# Altium PCB ETH_POE_SPI_RJ45.PcbDoc
Units mm, origin at the board's own origin, x right, y up, seen from the top; angles counter-clockwise.
Board outline 24 x 24.6 mm, 2 copper layers (Top Layer, Bottom Layer), stack 1.571 mm thick; 14 components, 24 nets, 65 pads, 6 vias.
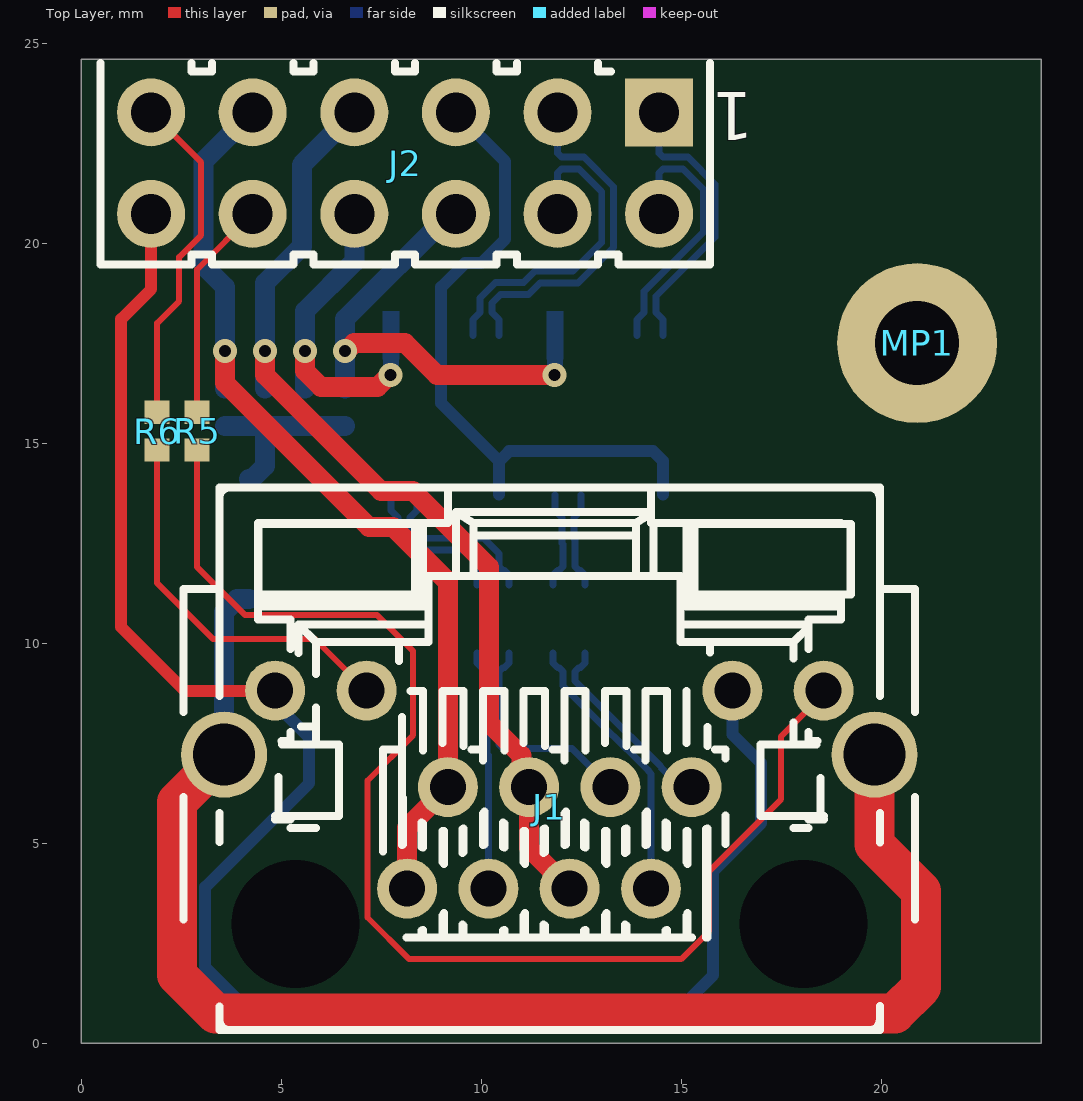
[diagram p0: Top Layer view]
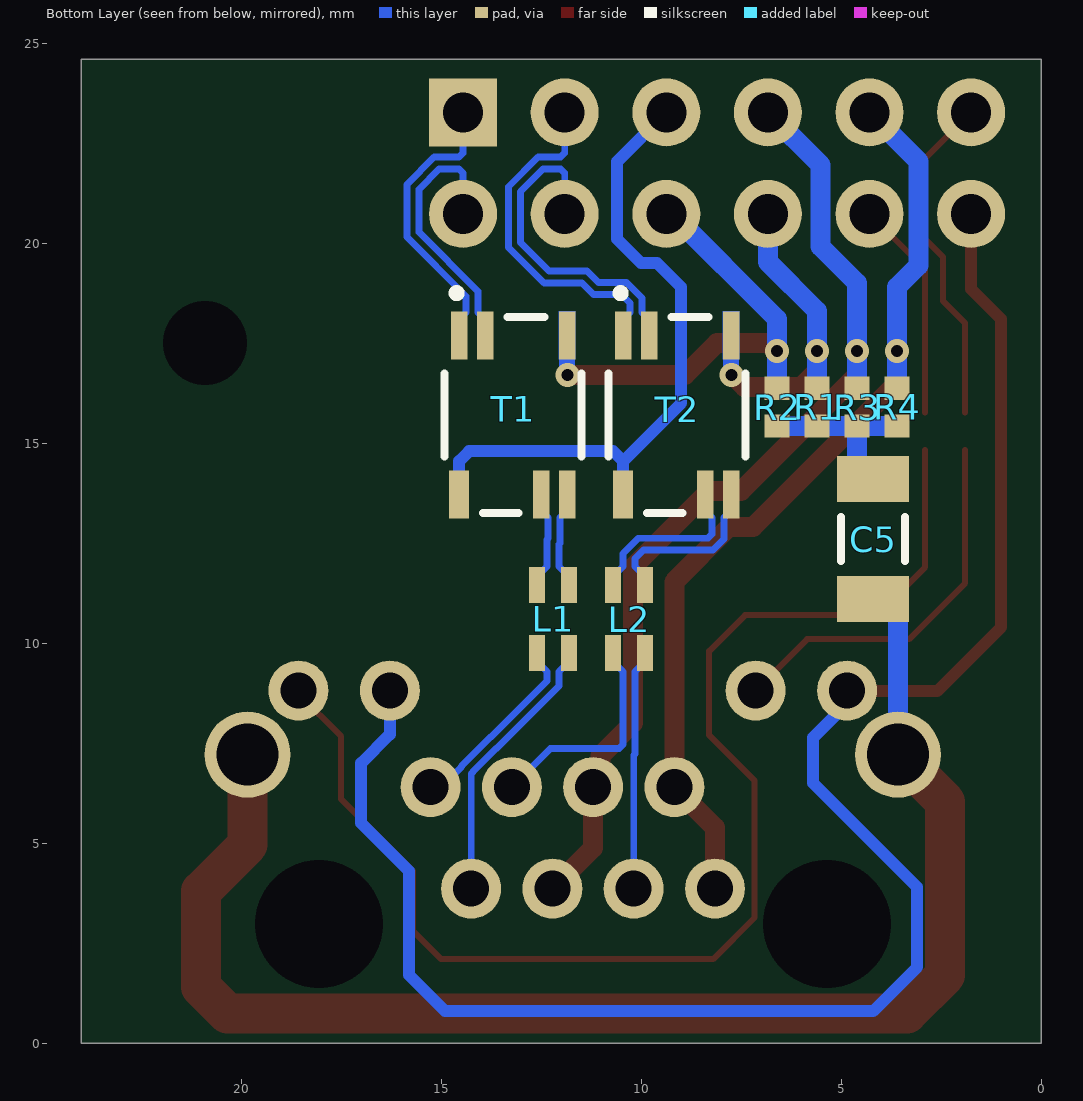
[diagram p1: Bottom Layer view, seen from below]
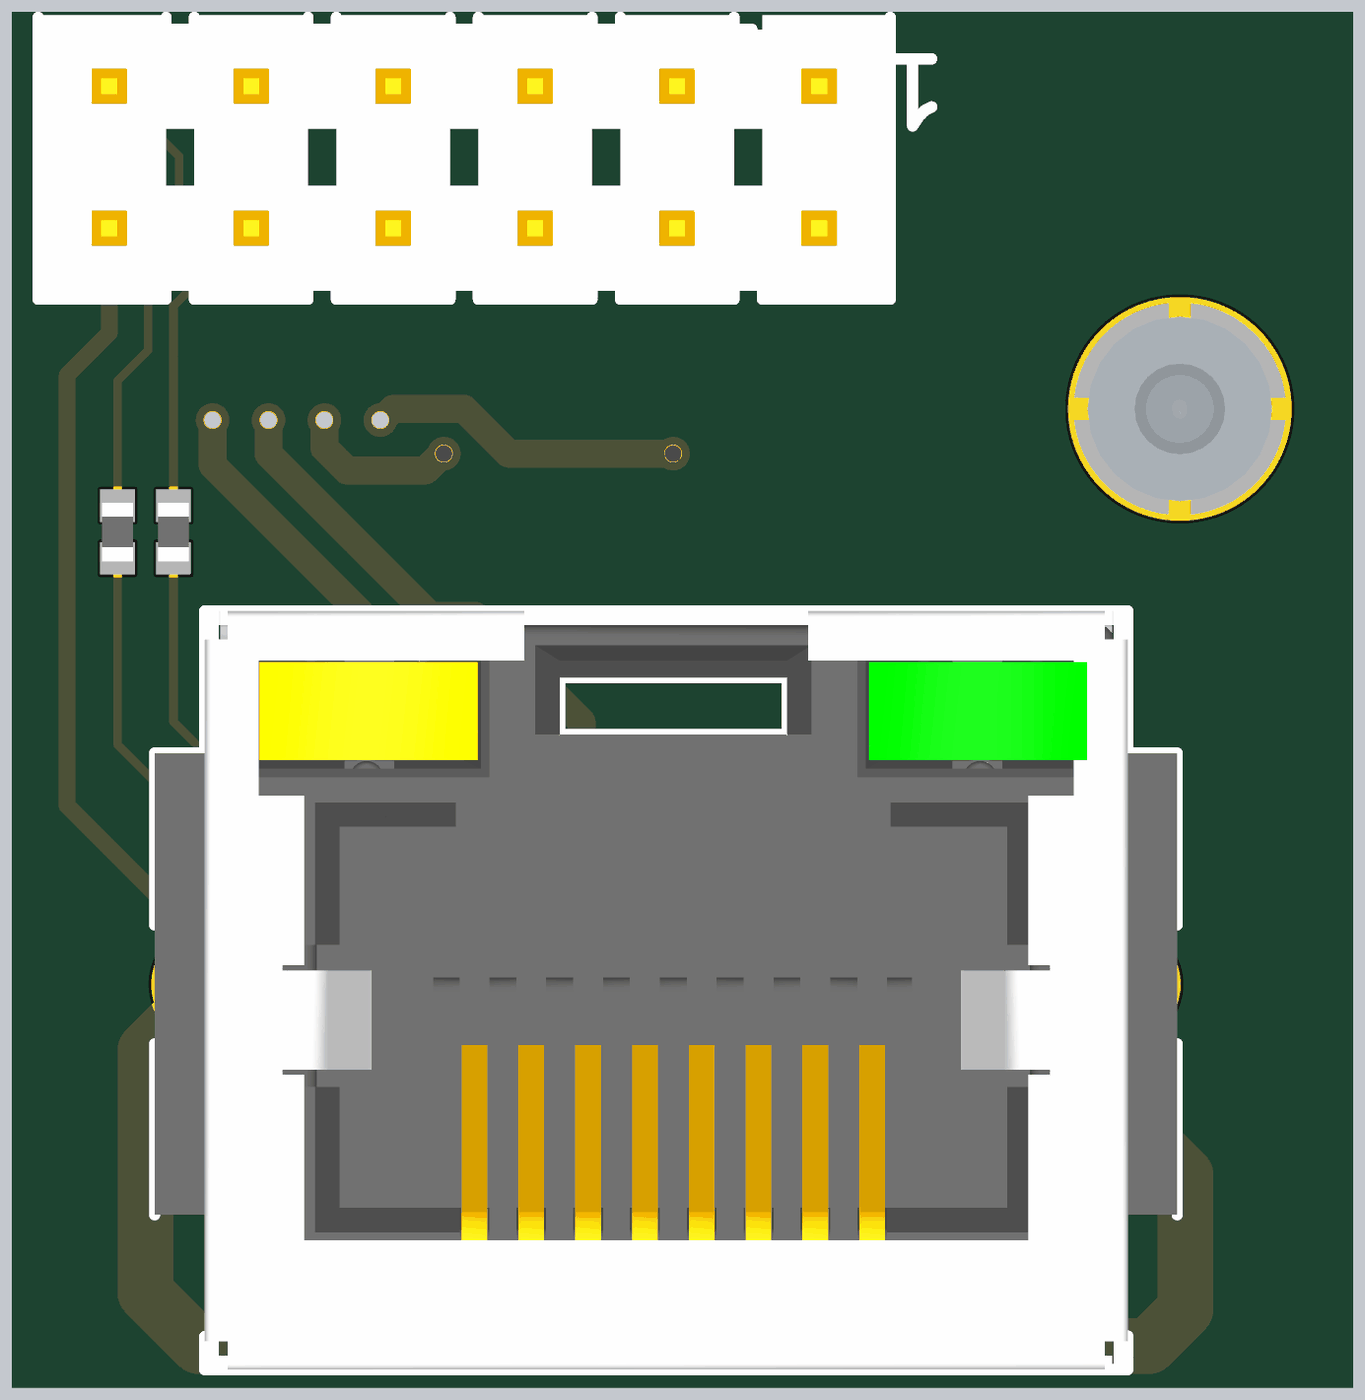
[diagram p2: 3D render of the assembled board from above, using the file's embedded part models]
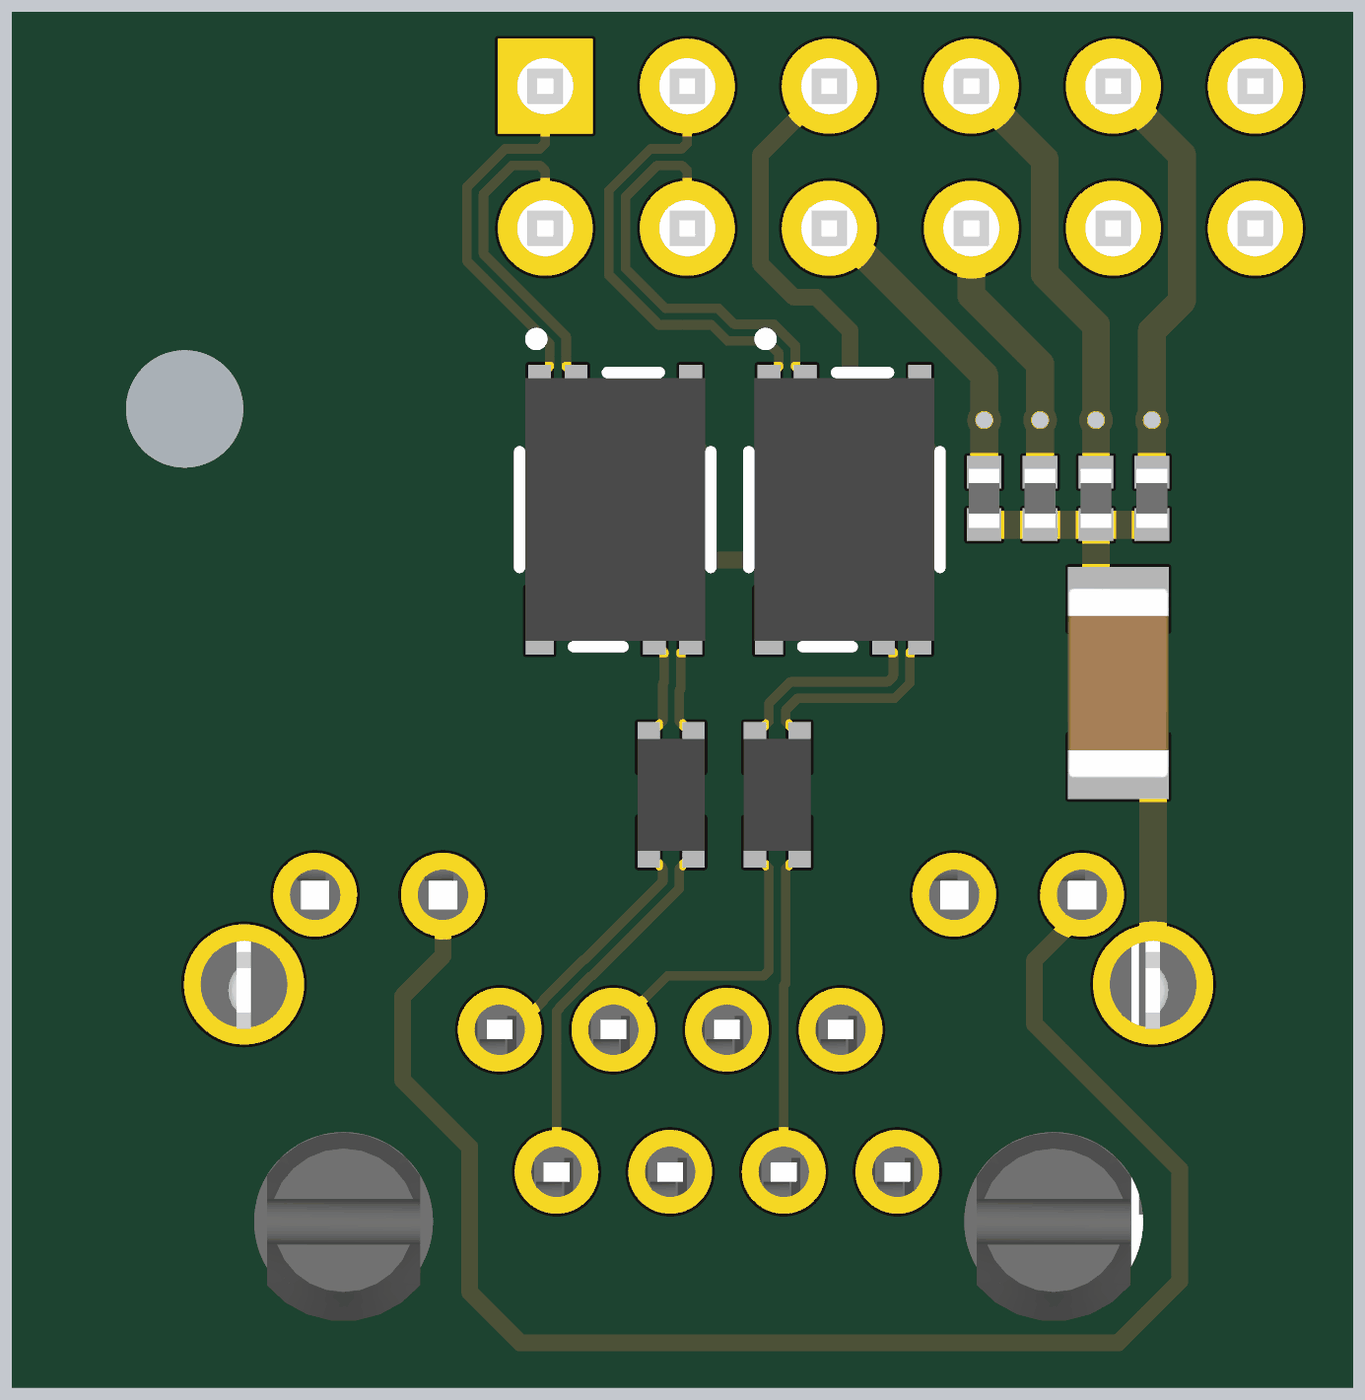
[diagram p3: 3D render of the assembled board from below, using the file's embedded part models]

## Layer stack, top to bottom
Top Solder: solder mask 0.0102, Solder Resist, Dk 3.5
Top Layer: signal copper 0.0356
Dielectric 1: dielectric 1.5, FR-4, Dk 4.8
Bottom Layer: signal copper 0.0356
Bottom Solder: solder mask 0.0102, Solder Resist, Dk 3.5

## Board outline
0,0 24,0 24,24.6 0,24.6

## Design rules (kind name [scope] priority, off if disabled: settings)
Clearance Clearance_transformer [((Net = 'PoE_POWER_3') or (Net = 'PoE_POWER_1'))] p1: gap=0 ignorepadtopadclearanceinfootprint=TRUE
Clearance [All] p2: gap=0.127 ignorepadtopadclearanceinfootprint=TRUE
DiffPairsRouting [All] p1: maxlimit=0.127 minlimit=0.127 mostfreqgap=0.127 toplayer_minwidth=0.17 toplayer_maxwidth=0.17 toplayer_prefwidth=0.17 bottomlayer_minwidth=0.17 bottomlayer_maxwidth=0.17 bottomlayer_prefwidth=0.17 impedanceprofiledriven=TRUE impedanceprofileid={63DAA46B-365F-4812-932B-840EA15B634E} impedanceprofilevalue=100.000000 maxuncoupledlength=12.7
HoleSize [All] p1: absolutevalues=TRUE maxlimit=5 minlimit=0.025 maxpercent=80.000 minpercent=20.000
MinimumSolderMaskSliver [All] p1: minsoldermaskwidth=0.1
PolygonConnect [All] p1: connectstyle=Relief reliefconductorwidth=0.254 reliefentries=4 polygonreliefangle="90 Angle" airgapwidth=0.254
RoutingVias [All] p1: holewidth=0.3 width=0.6 viastyle="Through Hole" minholewidth=0.3 minwidth=0.6 maxholewidth=0.3 maxwidth=0.6
ShortCircuit ShortCircuit_transformer [((ObjectKind = 'Pad') And (Net = 'PoE_POWER_3') And (Component = 'T2')) or ((ObjectKind = 'Pad') And (Net = 'PoE_POWER_1') And (Component = 'T1'))] p1: allowed=TRUE
ShortCircuit [(ObjectKind = 'Pad') And (Net = 'PoE_POWER_3') And (Component = 'T2') or (ObjectKind = 'Pad') And (Net = 'PoE_POWER_1') And (Component = 'T1')] p2: allowed=TRUE
SilkToSolderMaskClearance [IsPad] p1: minsilkscreentomaskgap=0.1 clearancetoexposedcopper=TRUE
SolderMaskExpansion [All] p1: expansion=0.05 istentingtop=FALSE
SupplyNets "Schematic Supply Nets_1" [InNet('P3V3')] p1: voltage=0.000
SupplyNets "Schematic Supply Nets" [InNet('SHIELD')] p2: voltage=0.000
Width [All] p1: maxlimit=3 minlimit=0.127 preferedwidth=0.2
25 further rules are at their usual default settings.

## Classes and differential pairs
net class D100: DA_CMC_N DA_CMC_P DA_N DA_P DB_CMC_N DB_CMC_P DB_N DB_P RX_N RX_P TX_N TX_P
differential pair DB_CMC: +DB_CMC_P -DB_CMC_N
differential pair DA_CMC: +DA_CMC_P -DA_CMC_N
differential pair DB: +DB_P -DB_N
differential pair DA: +DA_P -DA_N
differential pair TX: +TX_P -TX_N
differential pair RX: +RX_P -RX_N

## Components (designator, comment, footprint, x,y, rotation, side; value= is the part's Value field where it differs from the comment)
C5 "1nF" CAPC3216X180N 4.2,12.6 r90 bottom
J1 "RJ45" AMPHENOL_RJHSE-3381 11.708,5.13 r0 top
J2 "Header 12" SAMTEC_HTSW-106-23-L-D 8.1,22 r180 top
L1 "370Ohm" WE-CNSW_0805 12.2,10.6 r270 bottom
L2 "370Ohm" WE-CNSW_0805 10.3,10.6 r270 bottom
MP1 "M1.6 x 6mm" 97730606334 20.9,17.5 r0 top
R1 "75" RESC1005X40N 5.6,15.9 r90 bottom
R2 "75" RESC1005X40N 6.6,15.9 r90 bottom
R3 "75" RESC1005X40N 4.6,15.9 r90 bottom
R4 "75" RESC1005X40N 3.6,15.9 r90 bottom
R5 "510" RESC1005X40N 2.9,15.3 r270 top
R6 "510" RESC1005X40N 1.9,15.3 r270 top
T1 "74930030" 74930030 13.2,15.7 r270 bottom
T2 "74930030" 74930030 9.1,15.7 r270 bottom

## Footprints (in the part's own frame and the unit in brackets; to place one, negate y for a bottom-side part, rotate by r counter-clockwise, add the part's x,y. Pads: shape width x height; smd on the part's side, far side on the other; paste and mask are expansions set on the pad)
74930030 [mm] "Super Tiny Signal Transformer, body 4.7x3.22mm"
  rect 1.2x0.41 smd: 1(-1.99,-1.35) 2(-1.99,-0.7) 6(1.99,0.7) 7(1.99,1.35)
  rect 0.6x0.41 smd: 3(-2.29,1.35) 4(-1.69,1.35)
  rect 1.2x0.5 smd: 5(1.99,-1.35)
  Top Layer region: -1.39,1.555 -2.59,1.555 -2.59,1.145 -2.59,1.145 -1.39,1.145
  silkscreen extent -3.15,-1.71 2.45,1.71, body extent -2.35,-1.61 2.35,1.61, height 2.83
97730606334 [mm] "SMT Steel Spacer with internal Thread M1.6, height 6mm"
  round 4 / inner rect 0x0 / far side rect 0x0 hole 2.1 unplated: 1(0,0)
  body extent -1.65,-1.65 1.65,1.65, height 6
AMPHENOL_RJHSE-3381 [mm] "1 Port, 8 Positions, CAT5 RJ45 Modular Connector With Yellow and Green LEDs and Shield"
  round 1.5 hole 0.9: 1(3.556,1.27) 2(2.54,-1.27) 3(1.524,1.27) 4(0.508,-1.27) 5(-0.508,1.27) 6(-1.524,-1.27) 7(-2.54,1.27) 8(-3.556,-1.27) 9(6.858,3.683) 10(4.572,3.683) 11(-4.572,3.683) 12(-6.858,3.683)
  round 1 hole 3.2 unplated mask+1.1: M1(6.35,-2.159) M2(-6.35,-2.159)
  round 2.15 hole 1.55: SHIELD(-8.13,2.081) SHIELD(8.13,2.081)
  silkscreen extent -9.14,-4.81 9.14,8.76, body extent -9.14,-4.81 9.14,8.76, height 16.32
CAPC3216X180N [mm] "Chip Capacitor, Body 3.2x1.6mm, IPC Medium Density"
  rect 1.15x1.8 smd: 1(-1.5,0) 2(1.5,0)
  silkscreen extent -0.55,-0.8 0.55,0.8, body extent -1.7,-0.9 1.7,0.9, height 1.8
RESC1005X40N [mm] "Chip Resistor, EIA 0402, Metric 1005, Body 1.0x0.5mm, IPC Medium Density"
  rect 0.58x0.62 smd: 1(-0.47,0) 2(0.47,0)
  body extent -0.52,-0.27 0.53,0.28, height 0.4
SAMTEC_HTSW-106-23-L-D [mm] "12 Contacts - Pitch 2.54mm - Dual Row  Through Mount Straigh Header (Post Lead 5.84mm, Tail Lead 2.92mm, Insulator 2.54mm)"
  rect 1.7x1.7 hole 1: 1(-6.35,-1.27)
  round 1.7 hole 1: 2(-6.35,1.27) 3(-3.81,-1.27) 4(-3.81,1.27) 5(-1.27,-1.27) 6(-1.27,1.27) 7(1.27,-1.27) 8(1.27,1.27) 9(3.81,-1.27) 10(3.81,1.27) 11(6.35,-1.27) 12(6.35,1.27)
  silkscreen extent -7.62,-2.5 7.62,2.54, body extent -7.62,-2.54 7.62,2.54, height 8.38
WE-CNSW_0805 [mm] "SMT Common Mode Line Filter, 4-leads, body 2.00x1.20mm"
  rect 0.9x0.4 smd: 1(-0.85,0.4) 2(0.85,0.4) 3(0.85,-0.4) 4(-0.85,-0.4)
  body extent -1,-0.6 1,0.6, height 1.2

## Part data
C5: library part CC1206_1NF_2KV_10%_X7R, "Non-polarised capacitor", Case=1206, Manufacturer=GENERIC, Manufacturer1 ComponentHeight=1.8mm, Manufacturer1 Example=AVX, Manufacturer1 Part Number=1206GC102KAT2A, Tolerance=±10%, Voltage=2kV, Author="CERN DEM JLC", Component Type=Standard, CreateDate=11/19/2012, HelpURL=\\cern.ch\dfs\Applications\Altium\Datasheets\CC1206_X7R_AVX_HV-MLC.pdf, LatestRevisionDate=5/17/2017, Manufacturer Part Number=CC1206_1NF_2KV_10%_X7R, Mounted=Yes, Part Description="High Voltage MLC Chip Capacitor", Part Number=CC1206_1NF_2KV_10%_X7R, Pin Count=2, Sense=No, SMD=Yes, Socket=No, Status=None, TC=X7R
J1: library part AMPHENOL_RJHSE-3381, "1 Port, 8 Positions, CAT5 RJ45 Modular Connector With Yellow And Green LEDs", Manufacturer=AMPHENOL, Manufacturer Part Number=RJHSE-3381, Author="CERN DEM JLC", Component Type=Standard, ComponentHeight=15.88mm, ComponentLink1Description="Package Drawing", ComponentLink1URL=\\cern.ch\dfs\Applications\Altium\Datasheets\AMPHENOL_RJHSE-3381_Package.pdf, CreateDate=3/4/2019, Family=RJ45, HelpURL=\\cern.ch\dfs\Applications\Altium\Datasheets\AMPHENOL_RJHSE-3381.pdf, LatestRevisionDate=3/4/2019, Mounted=Yes, Part Description="1 Port, 8 Positions, CAT5 RJ45 Modular Jack with Yellow and Green LEDs and Shield", Part Number=AMPHENOL_RJHSE-3381, Pin Count=14, PressFit=No, Sense=No, SMD=No, Socket=No, Status=None
J2: library part SAMTEC_HTSW-106-23-L-D, "Connector 12 Male", Manufacturer=SAMTEC, Manufacturer Part Number=HTSW-106-23-L-D, Author="CERN DEM JLC", Component Type=Standard, ComponentHeight=8.38mm, CreateDate=2/22/2018, Family="Header 12", HelpURL=\\cern.ch\dfs\Applications\Altium\Datasheets\SAMTEC_HTSW-106-23-L-D.pdf, LatestRevisionDate=2/22/2018, Mounted=Yes, Part Description="12 Contacts, Pitch 2.54mm, Dual Row Through Mount Straight Header (Post Lead 5.84mm, Tail Lead 2.92mm, Insulator 2.54mm)", Part Number=SAMTEC_HTSW-106-23-L-D, Pin Count=12, PressFit=No, Sense=No, SMD=No, Socket=No, Status=Preferred, Status Comment="High Temperature"
L1 L2: library part 744231371, "WE-CNSW SMT Common Mode Line Filter, size 0805, 370Ohm, 0.478uH, 50V", Case/Size Code=0805, DC Resistance Max=0.45Ohm, Inductance=0.478uH, Insulation Test Voltage (AC)=125V, Manufacturer="Wurth Elektronik", Operating Temperature Max=125°C, Operating Temperature Min=-40°C, Rated Current=0.28A, Rated Voltage=50V, Category="Common Mode Chokes", ComponentLink1Description="Website Link", ComponentLink1URL=https://www.we-online.com/redexpert/article/744231371?ad, ComponentLink2Description="Datasheet Link", ComponentLink2URL=https://www.we-online.com/redexpert/spec/744231371?ad, Height=1.2mm, Impedance @100MHz=370Ohm, Length=2mm, Manufacturer Part Number=744231371, Match Code=WE-CNSW, Mount="Surface Mount", Packaging="Tape and Reel", Width=1.2mm, Winding Style=bifiliar
MP1: library part 97730606334R, "WA-SMSI SMT Steel Spacer with internal Thread, OD 3.3mm, M1.6 x 6mm", Manufacturer="Wurth Elektronik", Operating Temperature Max=150°C, Operating Temperature Min=-55°C, Category="SMT Spacers", ComponentLink1Description="Website Link", ComponentLink1URL=https://www.we-online.com/redexpert/article/97730606334R?ad, ComponentLink2Description="Datasheet Link", ComponentLink2URL=https://www.we-online.com/redexpert/spec/97730606334R?ad, Height=6mm, Inside Diameter=1.9mm, Inside Thread Length=2mm, Manufacturer Part Number=97730606334R, Match Code=WA-SMSI, Material=Steel, Mount="Surface Mount", Outside Diameter=3.3mm, Packaging="Tape and Reel", Surface=Tin, Thread Size=M1.6
R1 R2 R3 R4: library part R0402_75R_1%_0.0625W_100PPM, "Resistor - 1%", Case=0402, Manufacturer=GENERIC, Manufacturer1 ComponentHeight=0.4mm, Manufacturer1 Example="YAGEO PHYCOMP", Manufacturer1 Part Number=232270677509L, Power=0.0625W, Tolerance=±1%, Author="CERN DEM JLC", Component Type=Standard, CreateDate=12/3/2007, HelpURL=\\cern.ch\dfs\Applications\Altium\Datasheets\R0402_Phycomp_RC0402.pdf, LatestRevisionDate=10/17/2012, Manufacturer Part Number=R0402_75R_1%_0.0625W_100PPM, Mounted=Yes, Part Description="General Purpose Thick Film Chip Resistor", Part Number=R0402_75R_1%_0.0625W_100PPM, Pin Count=2, PressFit=No, Sense=No, SMD=Yes, Socket=No, Status="Not Recommended", TC=±100ppm/°C
R5 R6: library part R0402_510R_1%_0.0625W_100PPM, "Resistor - 1%", Case=0402, Manufacturer=GENERIC, Manufacturer1 ComponentHeight=0.4mm, Manufacturer1 Example="YAGEO PHYCOMP", Manufacturer1 Part Number=232270675101L, Power=0.0625W, Tolerance=±1%, Author="CERN DEM JLC", Component Type=Standard, CreateDate=12/3/2007, HelpURL=\\cern.ch\dfs\Applications\Altium\Datasheets\R0402_Phycomp_RC0402.pdf, LatestRevisionDate=10/17/2012, Manufacturer Part Number=R0402_510R_1%_0.0625W_100PPM, Mounted=Yes, Part Description="General Purpose Thick Film Chip Resistor", Part Number=R0402_510R_1%_0.0625W_100PPM, Pin Count=2, PressFit=No, Sense=No, SMD=Yes, Socket=No, Status="Not Recommended", TC=±100ppm/°C
T1 T2: "WE-STST SMT Super Tiny Signal Transformer, size 4532, 1:1, 350uH", Case/Size Code=4532, Inductance=350uH, Insulation Test Voltage=1500Vrms, Manufacturer="Wurth Elektronik", Operating Temperature Max=105°C, Operating Temperature Min=-40°C, Application="Ethernet, PoE", Category="Signal Transformers", ComponentLink1Description="Website Link", ComponentLink1URL=https://www.we-online.com/redexpert/article/74930030?ad, ComponentLink2Description="Datasheet Link", ComponentLink2URL=https://www.we-online.com/redexpert/spec/74930030?ad, Data Rate=10/100/1GBase-T, Height=2.9mm, Length=4.7mm, Manufacturer Part Number=74930030, Match Code=WE-STST, Mount="Surface Mount", Packaging="Tape and Reel", Turns Ratio=1:1, Width=3.22mm

## Via types
v1: diameter 0.6, hole 0.3, Top Layer to Bottom Layer, tented both sides, 6 vias

## Nets (pads, with @x,y where several pads share a name; then routed paths per layer and width w, separated by ;. In a path a pad name is that pad's centre, name@x,y a point inside that pad or via, vN(x,y) a via of type N, cw(c..) or ccw(c..) an arc to the next point about the centre after c; other vN are vias at no path point)
DA_CMC_N: J1.2 L1.2 | length 6.9
  Bottom Layer w0.17: L1.2 11.8,9.5 11.915,9.385 11.952,9.385 12.052,9.285 12.052,8.928 12.977,8.003 13.618,7.362 13.63,7.362 14.194,6.798 14.194,6.784 14.248,6.73 J1.2
DA_CMC_P: J1.1 L1.3 | length 4.8
  Bottom Layer w0.17: L1.3 12.6,9.5 12.485,9.385 12.448,9.385 12.349,9.285 12.349,9.052 13.1,8.3 13.741,7.659 13.754,7.659 14.491,6.921 14.491,6.907 14.998,6.4 J1.1
DA_N: L1.1 T1.7 | length 2.5
  Bottom Layer w0.17: L1.1 11.8,11.7 11.915,11.815 11.952,11.815 12.052,11.915 12.052,12.469 12.026,12.494 12.026,13.138 11.85,13.315 T1.7
DA_P: L1.4 T1.6 | length 2.5
  Bottom Layer w0.17: T1.6 12.5,13.315 12.323,13.138 12.323,12.617 12.349,12.592 12.349,11.915 12.448,11.815 12.485,11.815 12.6,11.7 L1.4
DB_CMC_N: J1.6 L2.2 | length 6
  Bottom Layer w0.17: L2.2 9.9,9.5 10.015,9.385 10.052,9.385 10.152,9.285 10.152,7.796 10.151,7.226 10.184,7.193 J1.6
DB_CMC_P: J1.3 L2.3 | length 5.6
  Bottom Layer w0.17: L2.3 10.7,9.5 10.585,9.385 10.548,9.385 10.449,9.285 10.449,7.673 10.448,7.462 10.548,7.362 12.27,7.362 J1.3
DB_N: L2.1 T2.7 | length 4.4
  Bottom Layer w0.17: T2.7 7.75,13.315 7.926,13.138 7.926,12.599 8.2,12.325 9.939,12.325 10.152,12.112 10.152,11.915 10.052,11.815 10.015,11.815 9.9,11.7 L2.1
DB_P: L2.4 T2.6 | length 4.4
  Bottom Layer w0.17: T2.6 8.4,13.315 8.223,13.138 8.223,12.722 8.323,12.622 10.062,12.622 10.449,12.235 10.449,11.915 10.548,11.815 10.585,11.815 10.7,11.7 L2.4
LED_LINK: J2.10 R5.1 | length 5.5
  Top Layer w0.15: R5.1 2.9,19.34 J2.10
LED_SPEED: J2.11 R6.1 | length 8.5
  Top Layer w0.15: J2.11 3,22.02 3,20.2 2.45,19.65 2.45,18.55 1.9,18 R6.1
NetC5_2: C5.2 R1.1 R2.1 R3.1 R4.1 | length 4.5
  Bottom Layer w0.5: R4.1 R3.1 ; C5.2 4.275,14.1 4.6,14.425 R3.1 ; R2.1 R1.1 R3.1
NetJ1_9: J1.9 R5.2 | length 32.8
  Top Layer w0.15: R5.2 2.9,11.9 4.1,10.7 7.4,10.7 8.3,9.8 8.3,7.7 7.16,6.56 7.16,3.14 8.2,2.1 15,2.1 15.7,2.8 15.7,4.3 17.5,6.1 17.5,7.67 18.566,8.736 J1.9
NetJ1_11: J1.11 R6.2 | length 9.7
  Top Layer w0.15: R6.2 1.9,11.5 3.3,10.1 5.849,10.1 J1.11
NetJ2_5: J2.5 T1.5 T2.5 | length 16.7
  Bottom Layer w0.3: J2.5 10.6,22.04 10.6,20.1 10,19.5 9.6,19.5 9,18.9 9,16 10.45,14.55 ; T2.5 10.45,14.55 ; T1.5 14.55,14.55 14.3,14.8 10.7,14.8 10.45,14.55
P3V3: J1.10 J1.12 J2.12 | length 44.9
  Top Layer w0.3: J2.12 1.75,18.85 1,18.1 1,10.4 2.6,8.8 4.837,8.8 J1.12
  Bottom Layer w0.3: J1.12 4.85,8.488 5.7,7.638 5.7,6.5 3.1,3.9 3.1,1.9 4.2,0.8 14.9,0.8 15.8,1.7 15.8,4.3 17,5.5 17,7 16.28,7.72 J1.10
PoE_POWER_1: J2.6 R2.2 T1.3 T1.4 | length 12.5
  Top Layer w0.5: v1(6.6,17.3) 6.627,17.3 6.827,17.5 8.1,17.5 8.9,16.7 v1(11.836,16.7)
  Bottom Layer w0.4: v1@11.85,16.714 T1.4@11.85,17.34 ; T1.4 T1.3
  Bottom Layer w0.5: R2.2 v1(6.6,17.3) 6.6,18.1 9.23,20.73 J2.6
PoE_POWER_2: J1.4 J1.5 J2.7 R3.2 | length 24.9
  Top Layer w0.5: v1(4.6,17.3) 4.6,16.7 7.5,13.8 8.3,13.8 10.2,11.9 10.2,8 11.009,7.191 11.009,6.591 J1.5 11.2,4.876 J1.4
  Bottom Layer w0.5: R3.2 v1(4.6,17.3) 4.6,19 5.517,19.917 5.517,21.957 J2.7
PoE_POWER_3: J2.8 R1.2 T2.3 T2.4 | length 9
  Top Layer w0.5: v1(5.6,17.3) 5.6,16.8 6,16.4 7.409,16.4 7.709,16.7 v1(7.736,16.7)
  Bottom Layer w0.4: v1@7.75,16.714 T2.4@7.75,17.34 ; T2.4 T2.3
  Bottom Layer w0.5: R1.2 v1(5.6,17.3) 5.6,18.3 6.83,19.53 J2.8 ; v1(7.736,16.7) v1@7.75,16.714
PoE_POWER_4: J1.7 J1.8 J2.9 R4.2 | length 24.1
  Top Layer w0.5: v1(3.6,17.3) 3.6,16.5 7.2,12.9 7.8,12.9 9.168,11.532 J1.7 8.152,5.384 J1.8
  Bottom Layer w0.5: R4.2 3.6,18.9 3.063,19.437 3.063,22.043 J2.9
RX_N: J2.4 T2.2 | length 8.3
  Bottom Layer w0.17: T2.2 9.8,18.085 9.977,18.262 9.977,18.625 10.363,19.012 11.065,19.012 11.353,19.3 12.3,19.3 13.015,20.015 13.015,21.285 12.448,21.852 12.01,21.852 11.91,21.752 J2.4
RX_P: J2.3 T2.1 | length 8.8
  Bottom Layer w0.17: T2.1 10.45,18.085 10.273,18.262 10.273,18.502 10.486,18.715 11.188,18.715 11.476,19.003 12.423,19.003 13.312,19.892 13.312,21.408 12.571,22.149 12.01,22.149 11.91,22.248 J2.3
SHIELD: C5.1 J1.SHIELD | length 35.9
  Top Layer w1: J1.SHIELD@3.578,7.211 2.4,6.033 2.4,1.7 3.356,0.744 20.344,0.744 21,1.4 21,3.8 19.838,4.962 J1.SHIELD@19.838,7.211
  Bottom Layer w0.5: J1.SHIELD@3.578,7.211 3.578,10.775 3.903,11.1 C5.1
TX_N: J2.2 T1.2 | length 6.7
  Bottom Layer w0.17: T1.2 13.9,18.085 14.076,18.262 14.076,18.794 15.555,20.272 15.555,21.345 15.048,21.852 14.55,21.852 14.45,21.752 J2.2
TX_P: J2.1 T1.1 | length 7.2
  Bottom Layer w0.17: J2.1 14.45,22.248 14.55,22.149 15.171,22.149 15.852,21.468 15.852,20.149 14.373,18.671 14.373,18.262 14.55,18.085 T1.1
pads on no net: J1.M1 J1.M2 MP1.1

## Silkscreen, mask and mechanical layers (free items; w line width, h text height)
Mechanical 1:
  the board outline again, w0.1

## Text inside footprints (layer, text, board x,y; h text height)
J2: Top Overlay "1" at 16.822,23.768 h1.2 r180